# EAGLE board esp32ledstripdriver_v82 (EAGLE 9.7.0)
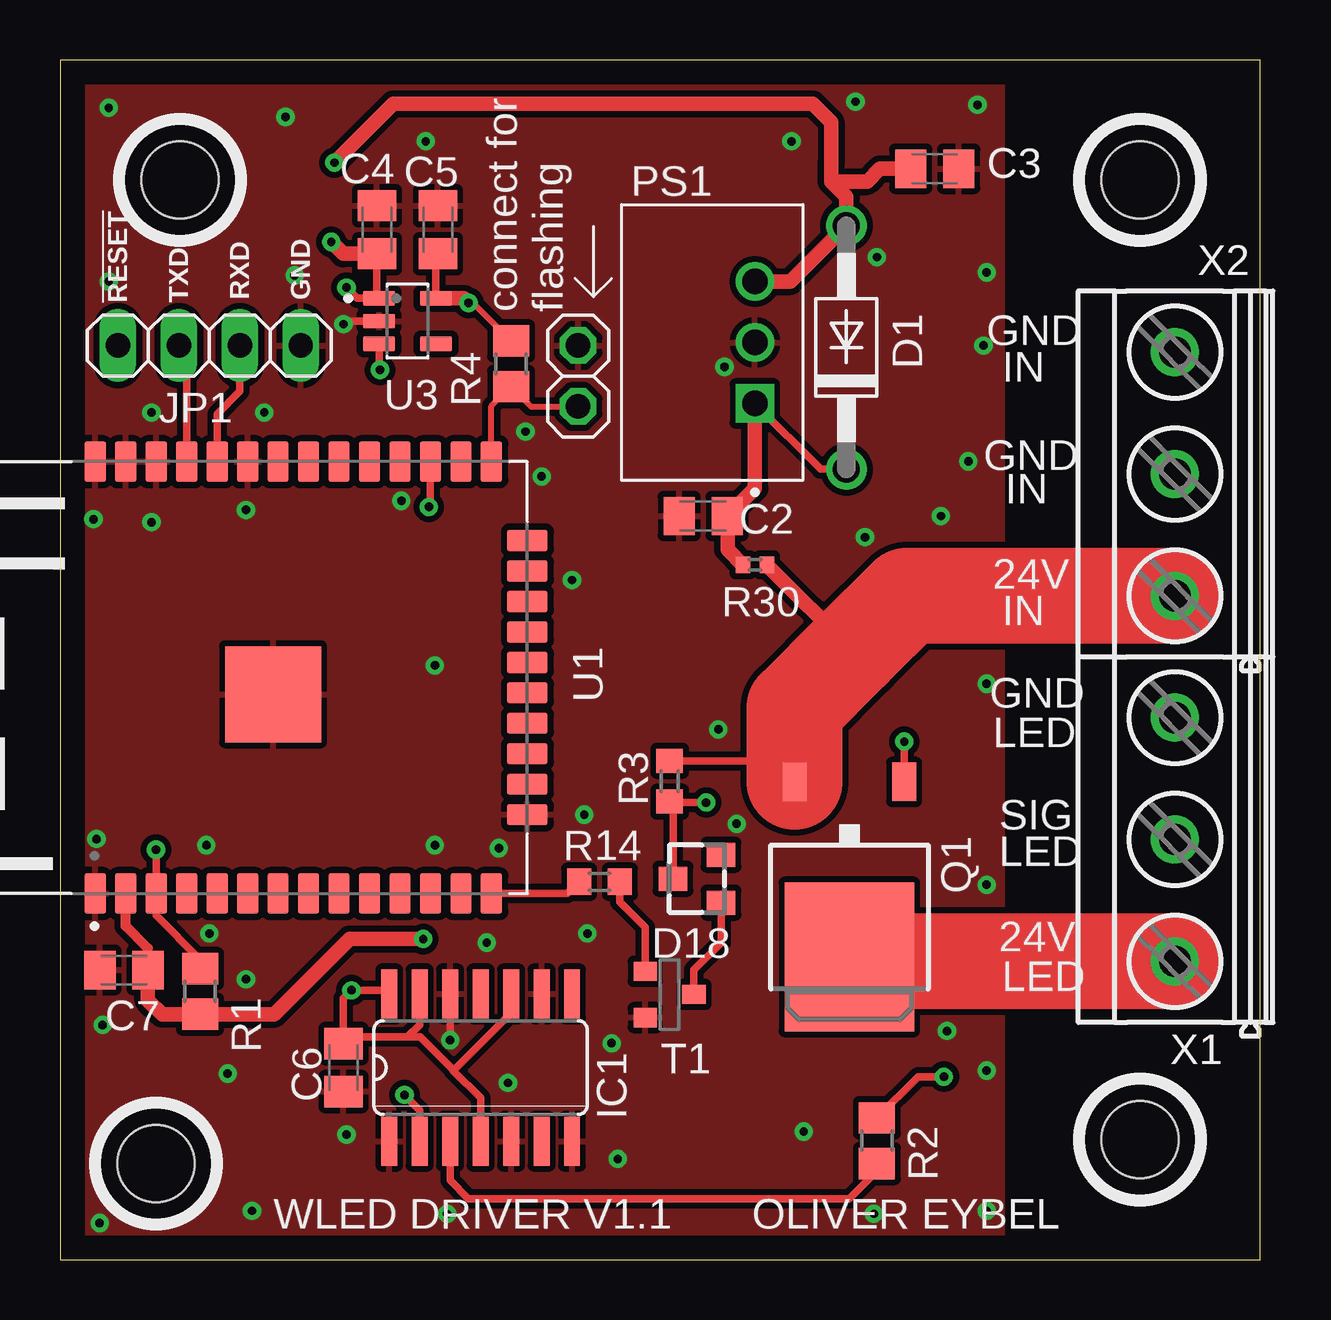
[diagram p0: board, top side]
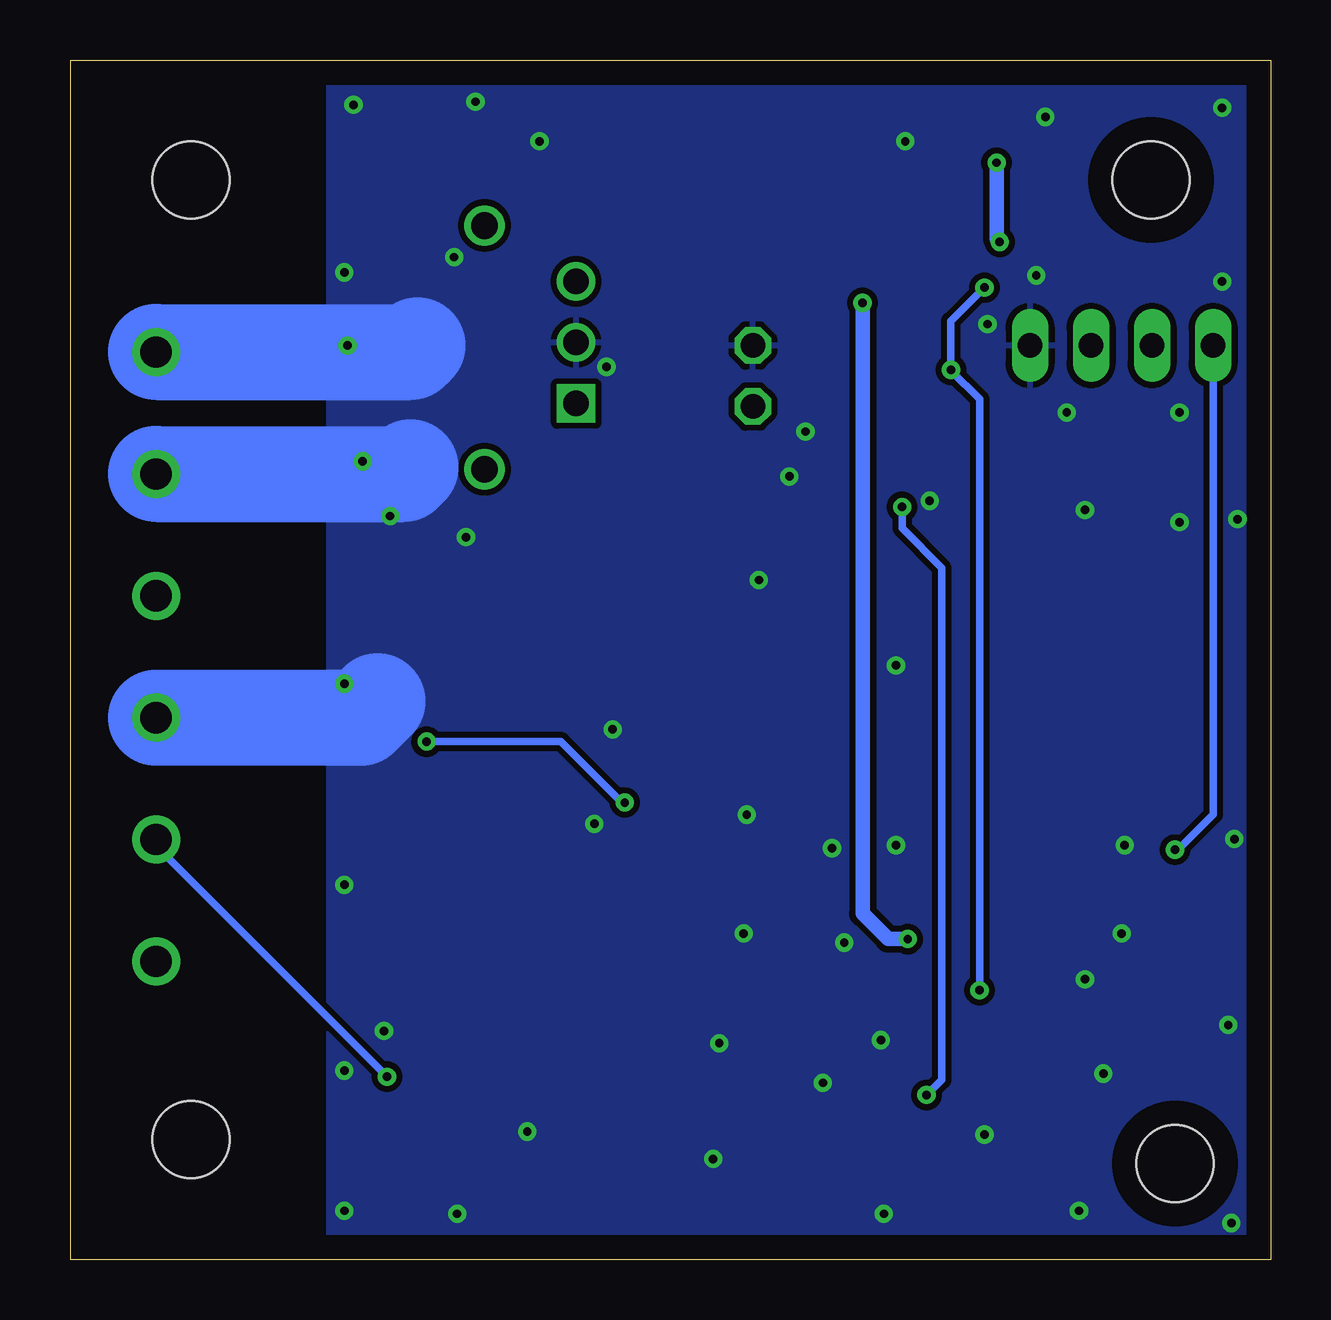
[diagram p1: board, bottom side, seen from below]

Size 50 x 50 mm. Coordinates in mm from the lower left corner, seen from the top.
Outline: 0,0 50,0 50,50 0,50 0,0
Copper layers (1*16): Top 0.035mm / dielectric 1.5mm / Bottom 0.035mm
Design rules "default *": minimum track width 6mil, minimum drill 0.35mm, track to track 6mil, track to pad 6mil, pad to pad 6mil, via to via 6mil, smd to smd 6mil, copper to edge 40mil, drill to drill 6mil, minimum pad ring 10mil, minimum via ring 8mil, stop-mask expansion 4mil, vias tented up to drill 3mm, thermal gap 10mil
Net classes: 0 default: width 0.254 mm, clearance 0.254 mm
Holes 3.2 mm at 4,4 5,45 45,45 45,5

## Footprints (pad centres in the part's own frame; a part is rotated, then mirrored left to right if it is on the bottom)
C0805K = smd 1.3 x 1.6: 1 -1,0; 2 1,0
DO41-10 = drill 1.118: A 5.08,0; C -5.08,0
TO236 = smd 1 x 1.2: A -1,-1; C 0,1; NC 1,-1
SO14 = smd 0.66 x 2.032: 1 -3.81,-3.073; 2 -2.54,-3.073; 3 -1.27,-3.073; 4 0,-3.073; 5 1.27,-3.073; 6 2.54,-3.073; 7 3.81,-3.073; 8 3.81,3.073; 9 2.54,3.073; 10 1.27,3.073; 11 0,3.073; 12 -1.27,3.073; 13 -2.54,3.073; 14 -3.81,3.073
1X04 = drill 1.016 long: 1 -3.81,0; 2 -1.27,0; 3 1.27,0; 4 3.81,0
1X01 = drill 1.016 octagon: 1 0,0
CONV_R-78K5.0-0.5 = drill 1.07 square: 1 -2.54,-1.775 | drill 1.07: 2 0,-1.775; 3 2.54,-1.775
TO252 = smd 1 x 1.6: 1 -2.28,-4.8; 2 2.28,-4.8 | smd 5.4 x 6.2: 3 0,2.5
R0805 = smd 1.3 x 1.5: 1 -0.95,0; 2 0.95,0
R0603 = smd 1 x 1.1: 1 -0.85,0; 2 0.85,0
R0402 = smd 0.6 x 0.7: 1 -0.5,0; 2 0.5,0
SOT-23 = smd 0.972 x 0.802: 1 -1.016,0.965; 2 -1.016,-0.965; 3 1.016,0
MODULE_ESP-WROOM-32 = smd 1.7 x 0.9: 1 -9,8.255; 2 -9,6.985; 3 -9,5.715; 4 -9,4.445; 5 -9,3.175; 6 -9,1.905; 7 -9,0.635; 8 -9,-0.635; 9 -9,-1.905; 10 -9,-3.175; 11 -9,-4.445; 12 -9,-5.715; 13 -9,-6.985; 14 -9,-8.255; 25 9,-8.255; 26 9,-6.985; 27 9,-5.715; 28 9,-4.445; 29 9,-3.175; 30 9,-1.905; 31 9,-0.635; 32 9,0.635; 33 9,1.905; 34 9,3.175; 35 9,4.445; 36 9,5.715; 37 9,6.985; 38 9,8.255 | smd 4 x 4: 1.1 -0.7,0.845 | smd 0.9 x 1.7: 15 -5.715,-9.755; 16 -4.445,-9.755; 17 -3.175,-9.755; 18 -1.905,-9.755; 19 -0.635,-9.755; 20 0.635,-9.755; 21 1.905,-9.755; 22 3.175,-9.755; 23 4.445,-9.755; 24 5.715,-9.755
SOT95P285X140-5N = smd 1.35 x 0.6: 1 -1.185,0.95; 2 -1.185,0; 3 -1.185,-0.95; 4 1.185,-0.95; 5 1.185,0.95
MKDSN1,5/3-5,08 = drill 1.3 pad 2: 1 -7.641,0.025; 2 -2.561,0.025; 3 2.519,0.025

## Placement (x,y rotation side)
C2  1µ  [C0805K]  26.8,30.99 180 top
C3  10µ  [C0805K]  36.45,45.47 0 top
C4  1µ  [C0805K]  13.21,42.93 90 top
C5  1µ  [C0805K]  15.75,42.93 90 top
C6  1µ  [C0805K]  11.81,8 270 top
C7  10µ  [C0805K]  2.67,12.06 180 top
D1  1N4004  [DO41-10]  32.77,38.02 90 top
D18  BZX84CSMD  [TO236]  26.54,15.88 90 top
IC1  74AC125D  [SO14]  17.53,8 0 top
JP1  [1X04]  6.22,38.1 180 top
JP2  [1X01]  21.59,38.1 0 top
JP3  [1X01]  21.59,35.56 0 top
PS1  R-78K5.0-0.5  [CONV_R-78K5.0-0.5]  27.18,38.23 90 top
Q1  DMP4010SK3Q-13  [TO252]  32.89,15.11 180 top
R1  10k  [R0805]  5.84,11.18 270 top
R2  100  [R0805]  34.04,4.95 270 top
R3  10k  [R0603]  25.4,19.94 90 top
R4  10k  [R0805]  18.8,37.34 90 top
R14  22  [R0603]  22.48,15.75 0 top
R30  ERB-RD2R00X  [R0402]  28.96,28.96 0 top
T1  SI2356DS-T1-GE3  [SOT-23]  25.4,11.05 0 top
U1  ESP-WROOM-32  [MODULE_ESP-WROOM-32]  9.72,24.26 90 top
U3  AP2112K-3.3TRG1  [SOT95P285X140-5N]  14.48,39.12 0 top
X1  MKDSN1,5/3-5,08  [MKDSN1,5/3-5,08]  46.48,20.07 90 top
X2  MKDSN1,5/3-5,08  [MKDSN1,5/3-5,08]  46.48,35.31 90 top

## Library data of the parts
C2-C7 = rcl; SPICEPREFIX: C
D1 D18 = diode
IC1 = 74xx-eu
JP1-JP3 = pinhead
PS1 = R-78K5.0-0.5; AVAILABILITY: In Stock; CHECK_PRICES: https://www.snapeda.com/parts/R-78K5.0-0.5/Recom+Power/view-part/?ref=eda; DESCRIPTION: DC-DC Converter, 1 Output, 6.5-36Vin, 5V/0.5A Output, SIP3, R-78K-0.5 Series | RECOM Power Inc. R-78K5.0-0.5; MF: Recom Power; MP: R-78K5.0-0.5; PACKAGE: None; PRICE: None; PURCHASE-URL: https://www.snapeda.com/api/url_track_click_mouser/?unipart_id=12768899&manufacturer=Recom Power&part_name=R-78K5.0-0.5&search_term=r-78k5.0-0.5; SNAPEDA_LINK: https://www.snapeda.com/parts/R-78K5.0-0.5/Recom+Power/view-part/?ref=snap
Q1 = transistor-fet
R1-R4 R14 R30 = rcl; SPICEPREFIX: R
T1 = SI2356DS-T1-GE3; AVAILABILITY: In Stock; CHECK_PRICES: https://www.snapeda.com/parts/SI2356DS-T1-GE3/Vishay+Siliconix/view-part/?ref=eda; DESCRIPTION: 40V .051ohm@10V 4.3A N-Ch T-FET | Siliconix / Vishay SI2356DS-T1-GE3; MF: Vishay Siliconix; MP: SI2356DS-T1-GE3; PACKAGE: SOT-23-3 Vishay; PRICE: None; PURCHASE-URL: https://www.snapeda.com/api/url_track_click_mouser/?unipart_id=587187&manufacturer=Vishay Siliconix&part_name=SI2356DS-T1-GE3&search_term=si2356ds-t1-ge3; SNAPEDA_LINK: https://www.snapeda.com/parts/SI2356DS-T1-GE3/Vishay+Siliconix/view-part/?ref=snap
U1 = ESP-WROOM-32; AVAILABILITY: Not in stock; DESCRIPTION: ESP-WROOM-32 series Transceiver; 802.11 b/g/n (Wi-Fi, WiFi, WLAN), Bluetooth® Smart 4.x Low Energy (BLE) Evaluation Board; MF: Espressif Systems; MP: ESP-WROOM-32; PACKAGE: Module Espressif Systems; PRICE: None
U3 = AP2112K-3.3TRG1; AVAILABILITY: In Stock; DESCRIPTION: Linear Voltage Regulator IC Positive Fixed 1 Output 600mA SOT-25; MF: Diodes Inc.; MP: AP2112K-3.3TRG1; PACKAGE: SOT-753 Diodes Inc.; PRICE: None; PURCHASE-URL: https://pricing.snapeda.com/search/part/AP2112K-3.3TRG1/?ref=eda
X1 X2 = con-phoenix-508

## Nets
24V_SWITCHED: Q1.3 X1.1
+3V3: C5.1 C7.1 R1.2 R4.2 U1.2 U3.5
+5V: C3.1 C4.1 C6.1 D1.A IC1.4 IC1.10 IC1.13 IC1.14 PS1.3 U3.1 U3.3
+24V: Q1.2 R3.2 R30.2 X2.1
EN: JP1.4 R1.1 U1.3
GND: C2.2 C3.2 C4.2 C5.2 C6.2 C7.2 IC1.1 IC1.5 IC1.7 IC1.9 IC1.12 JP1.1 JP2.1 PS1.2 T1.2 U1.1 U1.1.1 U1.15 U1.33 U1.36 U1.37 U1.38 U3.2 X1.3 X2.2 X2.3
LED_PIN_3V3: IC1.2 U1.27
LED_PIN_5V: IC1.3 R2.2
N$2: JP1.3 U1.35
N$3: JP1.2 U1.34
N$4: R2.1 X1.2
N$5: D18.C Q1.1 R3.1
N$6: R14.2 T1.1
N$7: D18.A T1.3
N$8: JP3.1 R4.1 U1.25
N$9: C2.1 D1.C PS1.1 R30.1
POWER_ON: R14.1 U1.14

## Tracks (layer width: path | path; a pad name or v marks a point on that pad's centre or on a via)
24V_SWITCHED
  Top 4: X1.1 33.08,12.43 Q1.3
+3V3  (via drill 0.35)
  Top 0.254: v17.02,39.88 17.21,39.88 R4.2 18.98,38.1
  Top 0.305: C5.1 15.66,41.84 U3.5
  Top 0.406: C7.1 3.67,12.32 3.67,12.97 2.74,13.9 U1.2
  Top 0.61: U3.5 16.83,40.07 v17.02,39.88 | 3.67,12.32 3.67,10.81 4.25,10.23 R1.2 8.93,10.23 12.06,13.36 v15.14,13.36
  Bottom 0.61: v17.02,39.88 17.02,14.42 15.95,13.36 v15.14,13.36
+5V  (via drill 0.35)
  Top 0.305: C4.1 13.21,40.15 U3.1 12.38,40.07 v11.94,40.51 | U3.3 13.29,37.13 v13.34,37.08 | IC1.14 13.57,11.22 v12.14,11.22 11.81,10.89 11.81,9.14 | 11.81,9.14 C6.1 | IC1.4 17.53,6.73 16.38,7.87 16.4,7.89 | 14.48,9.27 11.94,9.27 11.81,9.14 | IC1.13 14.99,9.78 14.48,9.27 | IC1.10 18.8,10.29 16.4,7.89 | 16.4,7.89 15.02,9.27 14.48,9.27
  Top 0.61: 32.13,44.93 33.63,44.93 34.16,45.47 C3.1 | C4.1 11.79,41.93 v11.3,42.42 | v11.43,45.72 13.88,48.17 31.37,48.17 32.13,47.41 32.13,45.72 32.13,44.93 | PS1.3 30.43,40.77 31.66,42 D1.A 32.77,44.3 32.13,44.93
  Bottom 0.305: v11.94,40.51 13.34,39.12 v13.34,37.08 13.34,37.05 12.14,35.86 v12.14,11.22
  Bottom 0.61: v11.3,42.42 11.43,42.55 v11.43,45.72
+24V
  Top 0.305: R3.2 29.74,20.79 Q1.2
  Top 0.61: 33.02,25.4 R30.2
  Top 4: X2.1 35.28,27.66 33.02,25.4 30.61,22.99 Q1.2
EN  (via drill 0.35)
  Top 0.305: v4,17.08 U1.3 | U1.3 | R1.1 5.84,12.49 4,14.34 U1.3
  Bottom 0.305: JP1.4 2.41,18.54 3.94,17.02 v4,17.08
GND  (via drill 0.35)
  Top 0.305: U3.2 11.94,39.12 v11.81,38.99 | IC1.12 v16.26,9.14
  Bottom 4: X2.3 35.84,37.83 35.56,38.1 | X1.3 37.91,22.59 37.23,23.26 | X2.2 36.13,32.74 35.86,33.02
  other vias: 9.4,47.62 2.03,48.01 2.03,40.77 9.78,41.02 15.24,46.61 30.48,46.61 33.15,48.26 38.23,48.13 38.61,41.15 38.48,38.1 37.85,33.27 36.7,30.99 27.69,37.21 27.43,22.1 21.34,28.32 20.07,32.64 21.84,18.54 28.19,18.16 38.61,15.62 38.61,24 38.61,2.03 36.96,9.53 38.61,7.87 33.91,1.91 16.13,1.91 1.65,1.52 1.78,9.78 6.99,7.75 8,2.03 7.75,11.68 6.22,13.59 17.78,13.21 6.1,17.27 15.62,17.27 3.81,30.73 1.52,17.53 1.4,30.86 7.75,31.24 23.24,4.19 30.99,5.33 22.99,9.02 21.97,13.59 8.51,35.31 3.81,35.31 18.29,17.14 15.62,24.77 14.22,31.62 11.94,5.21 18.67,7.37 34.04,41.78 19.4,34.51 33.54,30.11
  pour Top: -10.13,-3.73 39.29,-3.73 39.29,54.53 -10.13,54.53 -12.62,52.04 -12.62,-1.24
  pour Bottom: -10.13,-7.54 39.29,-7.54 39.29,57.07 -17.7,57.07 -16.43,-1.24
LED_PIN_3V3  (via drill 0.35)
  Top 0.305: IC1.2 14.99,6.22 v14.35,6.86 | v15.37,31.37 15.44,31.44 U1.27
  Bottom 0.305: v14.35,6.86 13.72,7.49 13.72,28.83 15.37,30.48 v15.37,31.37
LED_PIN_5V
  Top 0.305: IC1.3 16.26,3.3 17.02,2.54 32.89,2.54 33.97,3.62 R2.2
N$2
  Top 0.305: JP1.3 5.28,37.78 U1.35
N$3
  Top 0.305: JP1.2 7.49,36.2 6.55,35.25 U1.34
N$4  (via drill 0.35)
  Top 0.305: R2.1 35.75,7.62 v36.83,7.62
  Bottom 0.305: v36.83,7.62 46.46,17.25 X1.2
N$5  (via drill 0.35)
  Top 0.305: D18.C 25.54,18.95 R3.1 25.44,19.05 v26.92,19.05 | Q1.1 v35.17,21.58 v35.18,21.59
  Bottom 0.305: v35.18,21.59 29.59,21.59 27.05,19.05 v26.92,19.05
N$6
  Top 0.305: R14.2 23.33,14.9 24.38,13.84 T1.1
N$7
  Top 0.305: T1.3 26.42,12.06 27.56,13.21 27.56,14.86 D18.A
N$8
  Top 0.254: U1.25 17.98,35.57 R4.1 19.62,35.56 JP3.1
N$9
  Top 0.305: 28.27,29.14 R30.1 | C2.1 27.82,30.99 | PS1.1 31.7,32.94 D1.C
  Top 0.61: R30.1 27.82,29.6 27.82,30.99 | C2.1 28.95,32.14 PS1.1
POWER_ON
  Top 0.305: R14.1 21.14,15.26 U1.14

## Text on the board
tPlace: GND | IN | GND | IN | 24V | IN | GND | LED | SIG | LED | 24V | LED | WLED DRIVER V1.1 | OLIVER EYBEL
tNames: !RESET | TXD | RXD | GND | connect for / flashing